# EAGLE board Comparadores (EAGLE 9.6.2)

Size 160 x 100 mm. Coordinates in mm from the lower left corner, seen from the top.
Outline: 0,0 160,0 160,100 0,100 0,0
Copper layers (1*16): Top 0.035mm / dielectric 1.5mm / Bottom 0.035mm
Design rules "default": minimum track width 6mil, minimum drill 0.35mm, track to track 6mil, track to pad 6mil, pad to pad 6mil, via to via 6mil, smd to smd 6mil, copper to edge 40mil, drill to drill 6mil, minimum pad ring 10mil, minimum via ring 8mil, stop-mask expansion 4mil, vias tented up to drill 0mil, thermal gap 10mil

## Footprints (pad centres in the part's own frame; a part is rotated, then mirrored left to right if it is on the bottom)
SO14 = smd 0.6 x 2.2: 1 -3.81,-2.6; 2 -2.54,-2.6; 3 -1.27,-2.6; 4 0,-2.6; 5 1.27,-2.6; 6 2.54,-2.6; 7 3.81,-2.6; 8 3.81,2.6; 9 2.54,2.6; 10 1.27,2.6; 11 0,2.6; 12 -1.27,2.6; 13 -2.54,2.6; 14 -3.81,2.6
1X05 = drill 1.016 long: 1 -5.08,0; 2 -2.54,0; 3 0,0; 4 2.54,0; 5 5.08,0
1X03 = drill 1.016 long: 1 -2.54,0; 2 0,0; 3 2.54,0
RTRIM64W = drill 0.61: 1 1.27,-2.54; 2 1.27,0; 3 1.27,2.54

## Placement (x,y rotation side)
IC1  LM324D  [SO14]  -27.94,15.24 0 top  (outside the outline)
JP1  [1X05]  -20.32,25.4 0 top  (outside the outline)
JP2  [1X03]  -17.78,31.75 0 top  (outside the outline)
R1  [RTRIM64W]  -16.51,6.35 0 top  (outside the outline)
R2  [RTRIM64W]  -24.13,6.35 0 top  (outside the outline)
R3  [RTRIM64W]  -16.51,17.78 0 top  (outside the outline)

## Library data of the parts
IC1 = linear
JP1 JP2 = pinhead
R1-R3 = rcl; SPICEMODEL: X; SPICEPREFIXL: POT

## Nets
BAND: IC1.10 JP1.3
CMPB: JP2.2
CMPH: IC1.7 IC1.8 JP2.3
CMPL: IC1.1 JP2.1
GND: IC1.11 JP1.5 R1.1 R2.1 R3.1
HIGH: IC1.5 JP1.4
LOW: IC1.3 JP1.2
N$1: IC1.2 R1.2
N$3: IC1.6 R2.2
N$16: IC1.9 R3.2
VCC: IC1.4 JP1.1 R1.3 R2.3 R3.3

## Tracks (layer width: path | path; a pad name or v marks a point on that pad's centre or on a via)
BAND  (1 unrouted)
CMPH  (2 unrouted)
CMPL  (1 unrouted)
GND  (4 unrouted)
HIGH  (1 unrouted)
LOW  (1 unrouted)
N$1  (1 unrouted)
N$3  (1 unrouted)
N$16  (1 unrouted)
VCC  (4 unrouted)